# Altium PCB Gorilla Mist PCB file.PcbDoc
Units mm, origin at the board's own origin, x right, y up, seen from the top; angles counter-clockwise.
Board outline 46 x 86 mm, 2 copper layers (Top Layer, Bottom Layer); 56 components, 42 nets, 201 pads, 70 vias.
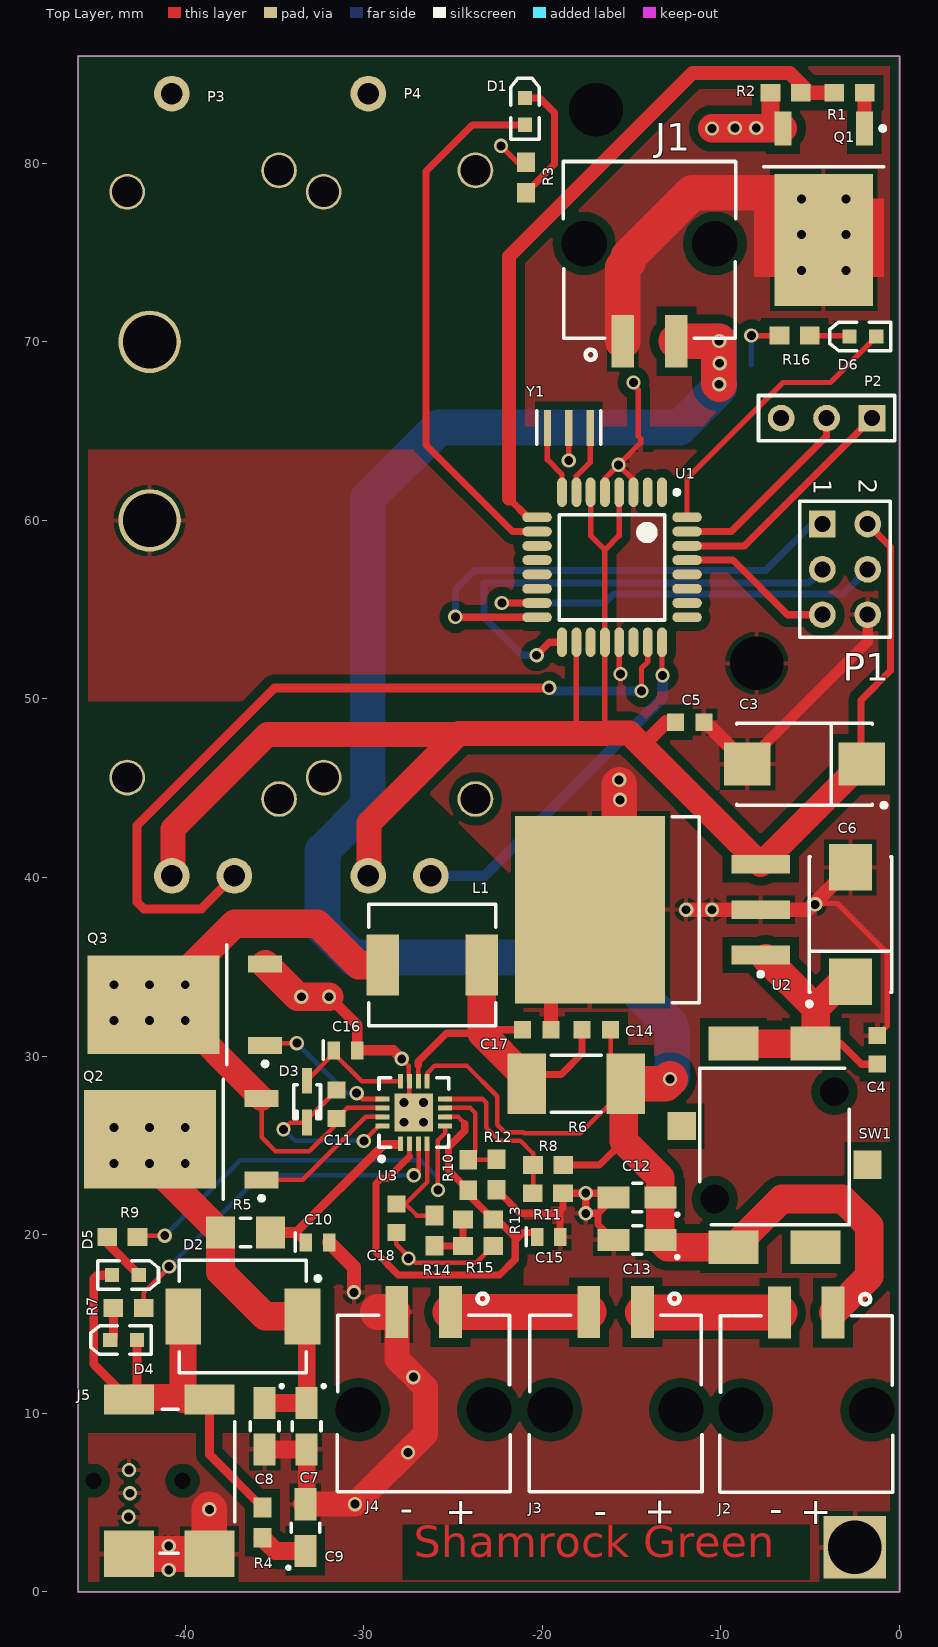
[diagram p0: Top Layer view]
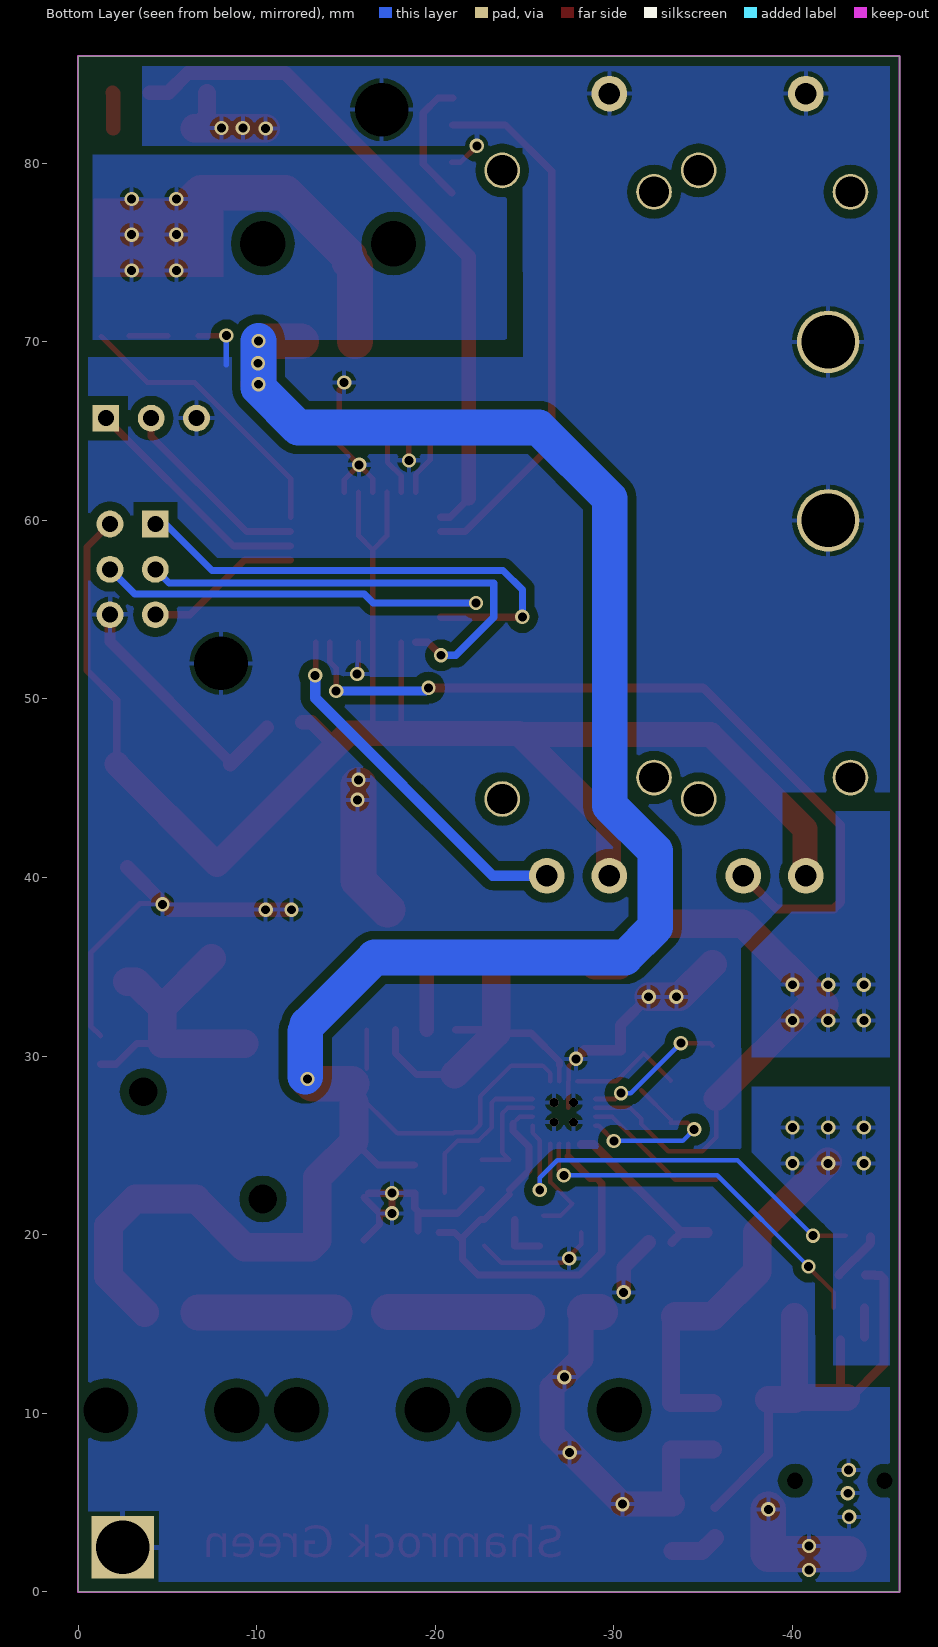
[diagram p1: Bottom Layer view, seen from below]

## Layer stack, top to bottom
Top Layer: signal copper 0.0356
Dielectric: dielectric 0.32, FR-4, Dk 4.8
Bottom Layer: signal copper 0.0356

## Board outline
0,86 -46,86 -46,0 0,0

## Design rules (kind name [scope] priority, off if disabled: settings)
Clearance Clearance_3 [InPolygon] p1: gap=0.5
Clearance [All] p2: gap=0.2
PlaneClearance [All] p1: clearance=0.8
PolygonConnect [All] p1: connectstyle=Relief reliefconductorwidth=0.254 reliefentries=4 polygonreliefangle="90 Angle" airgapwidth=0.254
RoutingVias [All] p1: holewidth=0.4 width=0.8 viastyle="Through Hole" minholewidth=0.3 minwidth=0.5 maxholewidth=0.8 maxwidth=1.2
SolderMaskExpansion [All] p1: expansion=0.102
Width [All] p1: maxlimit=3 minlimit=0.254 preferedwidth=0.4
27 further rules are at their usual default settings.

## Classes and differential pairs
component class "User Control Interface": D6 P1 P2 P3 P4 R16
component class "Power Management": C3 C4 C5 C6 C7 C8 C9 C10 C11 C12 C13 C14 C15 C16 C17 C18 D2 D3 D4 D5 J2 J3 J4 J5 L1 Q2 Q3 R4 R5 R6 R7 R8 R9 R10 R11 R12 R13 R14 R15 SW1 U2 U3
component class "Motor Interface": D1 J1 Q1 R1 R2 R3
component class "microcontroller interface": U1 Y1

## Components (designator, comment, footprint, x,y, rotation, side; value= is the part's Value field where it differs from the comment)
C3 "T491D107K016AT" D -5.325,46.35 r180 top
C4 "C0603C104K3RACTU" 0603 -1.25,30.35 r270 top
C5 "C0603C104K3RACTU" 0603 -11.75,48.7 r180 top
C6 "T491D107K016AT" D -2.75,37.375 r90 top
C7 "T491A106K010AT" A -33.2,9.275 r270 top
C8 "T491A106K010AT" A -35.55,9.275 r270 top
C9 "T491A225K010AT" A -33.275,3.6 r90 top
C10 "298D106X06R3M2T" M -32.6,19.575 r0 top
C11 "C0603C104K4RACTU" 0603 -31.525,27.3 r270 top
C12 "T491A106K010AT" A -14.7,22.075 r180 top
C13 "T491A106K010AT" A -14.7,19.7 r180 top
C14 "C0603C104K4RACTU" 0603 -16.975,31.475 r0 top
C15 "298D106X06R3M2T" M -19.65,19.875 r0 top
C16 "298D106X06R3M2T" M -31.025,30.325 r0 top
C17 "C0603C104K4RACTU" 0603 -20.325,31.475 r180 top
C18 "C0603C104K4RACTU" 0603 -28.175,20.925 r90 top
D1 "HSMB-C190" 1.6X0.8X0.8 -20.975,82.9 r90 top
D2 "SSC54" "DO-214AB (SMC)" -36.775,15.425 r0 top
D3 "BAT760" SOD323 -33.175,27.45 r270 top
D4 "HSMA-C190" 1.6X0.8X0.8 -43.45,14.1 r180 top
D5 "HSMG-C190" 1.6X0.8X0.8 -43.35,17.75 r0 top
D6 "HSMB-C190" 1.6X0.8X0.8 -2.05,70.3 r180 top
J1 "43650-0210" 43650-0210 -14.025,75.5 r180 top
J2 "43650-0210" 43650-0210 -5.2,10.175 r0 top
J3 "43650-0210" 43650-0210 -15.875,10.2 r0 top
J4 "43650-0210" 43650-0210 -26.625,10.2 r0 top
J5 "PJ-014DH-SMT" PJ-014DH-SMT -40.15,6.225 r180 top
L1 "IHLP2525CZERxRxM11" IHLP -26.175,35.1 r180 top
P1 "Header 3X2" HDR2X3 -4.325,59.8 r270 top
P2 "Header 3" HDR1X3 -1.55,65.725 r180 top
P3 "PS30-10PB10BR10K" PS30-10PB10BRxxx -39,62 r90 top
P4 "PS30-10PB10BR10K" PS30-10PB10BRxxx -28,62 r90 top
Q1 "IRLR3103" TO-252AA_N -4.25,77.45 r270 top
Q2 "IRFR3303" TO-252AA_N -40.225,25.35 r180 top
Q3 "IRFR3303" TO-252AA_N -40.025,32.875 r180 top
R1 "ERJ3GEYJ101V" 3-0603 -2.8,83.95 r0 top
R2 "ERJ3GEYJ103V" 3-0603 -6.375,83.95 r180 top
R3 "ERJ3GEYJ471V" 3-0603 -20.925,79.2 r270 top
R4 "ERJ3EKF2001V" 3-0603 -35.675,3.875 r90 top
R5 "ERJ-8ENF10R0V" 8-1206 -36.625,20.125 r0 top
R6 "ERJM1WSF10MU" M1WS-2512 -18.1,28.45 r0 top
R7 "ERJ3GEYJ103V" 3-0603 -43.175,15.9 r180 top
R8 "ERJ3GEYJ514V" 3-0603 -19.675,23.9 r0 top
R9 "ERJ3GEYJ103V" 3-0603 -43.525,19.875 r180 top
R10 "ERJ-3GEYJ104V" 3-0603 -24.15,23.35 r270 top
R11 "ERJ-3GEYJ104V" 3-0603 -19.7,22.325 r180 top
R12 "ERJ3EKF2212V" 3-0603 -22.575,23.375 r90 top
R13 "ERJ3EKF9311V" 3-0603 -23.6,20.85 r0 top
R14 "ERJ3GEYJ101V" 3-0603 -26.05,20.225 r90 top
R15 "ERJ3GEYJ434V" 3-0603 -23.6,19.375 r180 top
R16 "ERJ3GEYJ471V" 3-0603 -5.875,70.35 r0 top
SW1 "PVB4-EE" PVB4-EE -7,25 r270 top
U1 "ATmega328P-AU" 32A_N -16.1,57.375 r270 top
U2 "LP2954AIS/NOPB" TS3B_N -13.825,38.2 r180 top
U3 "BQ24600" QFN16 -27.2,26.85 r90 top
Y1 "CSTCE16M0V53" CSTCE_V_C -18.525,65.175 r0 top

## Footprints (in the part's own frame and the unit in brackets; to place one, negate y for a bottom-side part, rotate by r counter-clockwise, add the part's x,y. Pads: shape width x height; smd on the part's side, far side on the other; paste and mask are expansions set on the pad)
1.6X0.8X0.8 [mm] "SM LED; 2 Flat Leads"
  rect 0.8x0.8 smd: 1(-0.75,0) 2(0.75,0)
  silkscreen extent -1.55,-0.8 1.85,0.8
3-0603 [mm] "Chip Resistor; Body 1.6 x 0.9 mm (LxW typ)"
  rect 1.1x1 smd: 1(-0.85,0) 2(0.85,0)
8-1206 [mm] "Chip Resistor; Body 3.1 x 1.6 mm (LxW typ)"
  rect 1.6x1.8 smd: 1(-1.4,0) 2(1.4,0)
  silkscreen extent -0.3,-0.8 0.3,0.8
32A_N [mm] "Thin QFP, 32-Leads, Body 7x7mm, Pitch 0.8mm, IPC Medium Density"
  oval 1.65x0.55 smd: 1(-4.2,2.8) 2(-4.2,2) 3(-4.2,1.2) 4(-4.2,0.4) 5(-4.2,-0.4) 6(-4.2,-1.2) 7(-4.2,-2) 8(-4.2,-2.8) 17(4.2,-2.8) 18(4.2,-2) 19(4.2,-1.2) 20(4.2,-0.4) 21(4.2,0.4) 22(4.2,1.2) 23(4.2,2) 24(4.2,2.8)
  oval 0.55x1.65 smd: 9(-2.8,-4.2) 10(-2,-4.2) 11(-1.2,-4.2) 12(-0.4,-4.2) 13(0.4,-4.2) 14(1.2,-4.2) 15(2,-4.2) 16(2.8,-4.2) 25(2.8,4.2) 26(2,4.2) 27(1.2,4.2) 28(0.4,4.2) 29(-0.4,4.2) 30(-1.2,4.2) 31(-2,4.2) 32(-2.8,4.2)
  silkscreen extent -4.32,-2.95 2.95,3.75, body extent -3.5,-3.5 3.5,3.5, height 1.2
0603 [mm] "Chip Capacitor, 2-Leads, Body 1.60x0.80mm, IPC Medium Density"
  rect 0.95x1 smd: 1(-0.8,0) 2(0.8,0)
  body extent -0.8,-0.4 0.8,0.4, height 0.8
43650-0210 [mm] "43650 series, Power connector, 2 position, SMT, 5A power"
  rect 1.27x2.92 smd: 1(1.477,5.47) 2(-1.523,5.47)
  rect 0x0 hole 2.54: 3(3.637,0) 4(-3.683,0)
  silkscreen extent -4.86,-4.6 4.81,6.51, body extent -4.84,-4.6 4.81,5.31, height 5.57
A [mm] "Capacitor, SM Tantalum; Body 3.2 x 1.6 mm (LxW typ)"
  rect 1.8x1.23 smd: 1(-1.31,0) 2(1.31,0)
  silkscreen extent -2.33,-0.8 0.25,1.03, body extent -1.6,-0.8 1.6,0.8, height 1.6
CSTCE_V_C [mm] "Ceremic Resonantor,  3-Leads, Body 3.20x1.35mm, IPC Medium Density"
  rect 0.4x2 smd: 1(-1.2,0) 2(0,0) 3(1.2,0)
  silkscreen extent -1.8,-0.9 1.8,0.95, body extent -1.68,-0.72 1.68,0.72, height 1
D [mm] "Capacitor, SM Tantalum; Body 7.3 x 4.3 mm (LxW typ)"
  rect 2.6x2.4 smd: 1(-3.2,0) 2(3.2,0)
  silkscreen extent -4.58,-2.3 3.8,2.42
"DO-214AB (SMC)" [mm] "Molded Diode, 2-Leads, Body 6.85x5.90mm, IPC Medium Density"
  rect 2x3.15 smd: 1(-3.345,0) 2(3.345,0)
  silkscreen extent -3.55,-3.15 4.33,3.15, body extent -3.55,-3.1 3.55,3.1, height 2.63
HDR1X3 [mm] "Connector; Header; 3 Position"
  rect 1.5x1.5 hole 0.9: 1(0,0)
  round 1.5 hole 0.9: 2(2.54,0) 3(5.08,0)
  silkscreen extent -1.27,-1.27 6.35,1.27
HDR2X3 [mm] "Connector; Header; 3x2 Position"
  rect 1.5x1.5 hole 0.9: 1(0,0)
  round 1.5 hole 0.9: 2(0,2.54) 3(2.54,0) 4(2.54,2.54) 5(5.08,0) 6(5.08,2.54)
  silkscreen extent -1.27,-1.27 6.35,3.81
IHLP [mm] "Molded Inductor, 2-Leads, Body 6.80x6.45mm, IPC Medium Density"
  rect 1.83x3.43 smd: 1(-2.77,0) 2(2.77,0)
  silkscreen extent -3.55,-3.4 3.55,3.4, body extent -3.55,-3.35 3.55,3.35, height 3
M [mm] "Chip Capacitor, 2-Leads, Body 1.60x0.85mm, IPC Medium Density"
  rect 0.7x1 smd: 1(-0.65,0) 2(0.65,0)
  silkscreen extent -1.25,-0.5 -1.25,0.53, body extent -0.8,-0.43 0.8,0.42, height 0.9
M1WS-2512 [mm] "Chip Resistor; Body 6.4 x 3.2 mm (LxW typ)"
  rect 2.15x3.4 smd: 1(-2.775,0) 2(2.775,0)
  silkscreen extent -1.4,-1.6 1.4,1.6
PJ-014DH-SMT [mm] "DC Power Jack, SMT, 1.35mm ID, 3.5mm OD."
  rect 2.8x1.7 smd: 1(-1.5,-4.55) 1(3,-4.55)
  rect 2.8x2.6 smd: 2(3,4.1) 3(-1.5,4.1)
  round 0 hole 0.9: 4(0,0) 5(5,0)
  silkscreen extent -2.92,-4 1.27,4.06, body extent -2.92,-3.94 6.48,4.06, height 5.2
PS30-10PB10BRxxx [mm]
  round 2 hole 1.2: 1(-21.9,1.75) 2(-21.9,-1.75) 3(21.9,1.75)
  round 2 hole 1.7: 4(-16.4,4.25) 5(16.4,4.25) 6(-17.6,-4.25) 7(17.6,-4.25)
PVB4-EE [mm] "SPDt switch, SMD"
  rect 1.575x1.575 smd: 0(1.08,5.2) 3(-1.08,-5.2)
  rect 1.9x2.8 smd: 1(5.7,2.3) 2(5.7,-2.3) C(-5.7,2.3) C(-5.7,-2.3)
  round 0 hole 1.6: 9(-3,3.35) 10(3,-3.35)
  silkscreen extent -4.32,-4.19 4.45,4.19, body extent -5.08,-4.83 4.95,4.57, height 6.4
QFN16 [mm] "QFN, 16-Leads, Body 3.50x3.50mm, Pitch 0.50mm, Thermal Pad 2.14x2.14mm, IPC Medium Density"
  rect 0.8x0.28 smd: 1(-1.75,0.75) 2(-1.75,0.25) 3(-1.75,-0.25) 4(-1.75,-0.75) 9(1.75,-0.75) 10(1.75,-0.25) 11(1.75,0.25) 12(1.75,0.75)
  rect 0.28x0.8 smd: 5(-0.75,-1.75) 6(-0.25,-1.75) 7(0.25,-1.75) 8(0.75,-1.75) 13(0.75,1.75) 14(0.25,1.75) 15(-0.25,1.75) 16(-0.75,1.75)
  rect 2.14x2.14 smd: 17(0,0)
  silkscreen extent -2.72,-1.95 1.95,1.95, body extent -1.8,-1.8 1.8,1.8, height 1
SOD323 [mm] "SOD-323/SC-76; 2 Leads; Body 1.7 x 1.3 mm, (LxW)"
  rect 1.45x0.55 smd: 1(1.175,0) 2(-1.175,0)
  silkscreen extent -0.95,-0.75 0.95,0.75
TO-252AA_N [mm] "D-PAK, 4-Leads, Body 6.1x6.5mm, Pitch 2.28mm, Lead Span 9.9mm, IPC Medium Density"
  rect 1.9x0.95 smd: 1(-4.5,2.28) 3(-4.5,-2.28)
  rect 7.4x5.5 smd: 4(1.75,0)
  silkscreen extent -4.62,-3.35 -2.35,3.43, body extent -2.25,-3.37 4.1,3.37, height 2.38
TS3B_N [mm] "D2-PAK, 4-Leads, Body 8.6x10.2mm, Pitch 2.54mm, Lead Span 14.2mm, IPC Medium Density"
  rect 3.3x1.05 smd: 1(-6.05,2.54) 2(-6.05,0) 3(-6.05,-2.54)
  rect 8.4x10.5 smd: 4(3.5,0)
  silkscreen extent -6.18,-5.2 -1.1,5.2, body extent -2.6,-5.2 6.29,5.2, height 4.64

## Part data
C3 C6: library part T491D, "Solid Tantalum Chip Capacitor, Standard T491 Series - Industrial Grade"
C4 C5 C11 C14 C17 C18: library part C0603, "Ceramic Chip Capacitor - Standard"
C7 C8 C9 C12 C13: library part T491A, "Solid Tantalum Chip Capacitor, Standard T491 Series - Industrial Grade"
C10 C15 C16: "Solid Tantalum Chip Capacitors  298D microtan, 10uF, 6.3V, 20%,  0603,"
D1 D6: "Blue Surface Mount Chip LED, Blue"
D2: "High Current Density Schottky Rectifier, 5A, 40V, DO-214AB (SMC)"
D3: "Schottky Barrier Diode"
D4 D5: library part HSMB-C190, "Blue Surface Mount Chip LED, Blue"
J1 J2 J3 J4: "Power Connector, Micro-Fit 3.0 Header, SMT, Single Row, Right Angle, 2 Circuits"
J5: "DC Power Jack, 1.3 ID 3.5 OD, 3.5A, 24VDC, Normally Closed Switch, SMT, Right Angle"
L1: library part IHLP2525CZ, "Low Profile, High Current IHLP Inductor, 1uH to 22uH, 2.5 to 9A saturation current"
P1: "Header, 3-Pin, Dual row"
P2: "Header, 3-Pin"
P3 P4: library part PSxx-10PB10BRxxx, "slide potentiometer"
Q1 Q2 Q3: "HEXFET Power MOSFET"
R1 R2 R3 R7 R8 R9 R10 R11 R14 R15 R16: library part ERJ3GE, "Thick Film Chip Resistor, 1 Ohm to 10M Ohm Range, 5% Tolerance, 0603 Size, 0.1 W"
R4 R12 R13: library part ERJ3EK, "Precision Thick Film Chip Resistor, 10 Ohm to 1M Ohm Range, 1% and 0.5% Tolerance, 0603 Size, 0.063 W"
R5: library part ERJ8EN, "Precision Thick Film Chip Resistor, 10 Ohm to 2.2M Ohm Range, 1% Tolerance, 1206 Size, 0.125 W"
R6: library part ERJM1WS, "Low Resistance Value Chip Resistor, 3m Ohm to 20m Ohm Range, 1% and 5% Tolerance, 2512 Size, 1 W"
SW1: library part PVB4-EE300NSLFS, "Low profile SPDT switch, SMD."
U1: "8-bit AVR Microcontroller, 32KB Flash, 1KB EEPROM, 2KB SRAM, 32-pin TQFP, Industrial Grade (-40°C to 85°C)"
U2: "5V Micropower Low-Dropout Voltage Regulator, 3-pin TO-263, Pb-Free"
U3: "Multi-cell Battery Charger IC, Lithium ion and Lithium Polymer, standalone."
Y1: "Ceremic Resonator, 16 MHz, Built-in capacitance 15pF, SMT, 5% tolerance"

## Free pads (board coordinates)
  rect 3.5x3.5 hole 3: 0(-2.5,2.5)
  rect 0x0 hole 3: 1(-8,52) 2(-17,83)
  round 3.5 hole 3: 3(-42,70) 4(-42,60)

## Via types
v1: diameter 0.8, hole 0.5, Top Layer to Bottom Layer, 66 vias
v2: diameter 0.5, hole 0.5, Top Layer to Bottom Layer, 4 vias

## Nets (pads, with @x,y where several pads share a name; then routed paths per layer and width w, separated by ;. In a path a pad name is that pad's centre, name@x,y a point inside that pad or via, vN(x,y) a via of type N, cw(c..) or ccw(c..) an arc to the next point about the centre after c; other vN are vias at no path point)
DEBUG_LED: D6.1 U1.32 | length 16.1
  Top Layer w0.3: U1.32 -11.9,62.35 -6.525,67.725 -3.875,67.725 D6.1
DEBUG_RXD: P2.1 U1.30 | length 13.3
  Top Layer w0.4: U1.30 -8.7,58.575 P2.1
DEBUG_TXD: P2.2 U1.31 | length 11
  Top Layer w0.4: U1.31 -9.425,59.375 -4.09,64.71 P2.2
GND: C3.2 C4.1 C5.1 C6.2 C7.2 C8.2 C9.2 C10.2 C12.2 C13.2 C15.2 C16.2 C17.1 C18.1 J4.2 J5.2 J5.3 P1.6 P2.3 P3.3 P4.3 pad.0 pad.1 pad.2 pad.3 pad.4 Q1.3 Q3.3 R2.2 R3.1 R11.1 R12.1 R15.1 R16.1 U1.3 U1.5 U1.21 U2.2 U2.4 U3.11 U3.17 Y1.2 | length 136.8
  Top Layer w0.254: C18.1 -28.175,19.475 -27.125,18.425 -23.7,18.425 R15.1 ; v1(-27.875,29.85) -27.477,29.452 -27.477,28.627 U3.11 U3.17@-27.45,27.1
  Top Layer w0.3: v1(-22.325,80.975) -21.4,80.05 R3.1 ; v1(-18.525,63.35) Y1.2 ; U1.5 -16.5,62.35 v1(-15.737,63.113) ; v1@-15.7,51.175 U1.21 ; U1.3 -14.9,62.275 v1(-15.737,63.113) ; -14.625,64.7 -14.625,67.325 ; -14.5,64.575 -14.5,64.35 v1(-15.737,63.113) ; v1(-8.3,70.35) R16.1 ; v1@-4.775,38.55 -3.475,38.55 -0.7,35.775 -0.7,31.7 C4.1
  Top Layer w0.4: R12.1 -21.25,21.2 -19.15,21.2 ; C15.2@-19.025,20.225 -19.025,21.2 ; C12.2@-16.26,22.325 v1(-17.575,22.325) ; C13.2 -16.885,20.575 -16.885,21.2 ; C12.2 -16.885,21.2 ; -19.15,21.2 -19.025,21.2 ; -19.15,21.2 -19.025,21.325 ; -19.025,21.2 -19.025,21.325 ; -19.025,21.325 -18.85,21.5 R11.1 v1(-17.575,22.325) ; v1(-17.575,22.325) v1(-17.575,21.2) -16.885,21.2
  Top Layer w0.6: v1(-31.95,33.325) -30.375,31.75 C16.2 -28.35,30.325 v1(-27.875,29.85) ; C3.2 -8.525,46.475 -1.785,53.215 P1.6
  Top Layer w0.8: C10.2 -30.55,18.175 v1(-30.55,16.775) ; C17.1 U2.4@-19.525,36 ; v1(-11.95,38.2) v1(-10.5,38.2) U2.2 -5.125,38.2 -4.775,38.55 C6.2 ; C5.1@-10.575,48.4 C3.2
  Top Layer w1: C8.2 C7.2 C9.2@-33.2,4.985 ; R2.2 -7.225,82.645 Q1.3
  Top Layer w1.4: C9.2 v1(-30.49,4.91) -26.55,8.85 -26.55,11.45 -28.148,13.048 J4.2
  Top Layer w1.6: Q3.3 -33.695,33.325 v1(-33.5,33.325) v1(-31.95,33.325) ; v1(-10.5,81.95) Q1.3
  Top Layer w2: J5.2 J5.3 v1(-38.65,4.625) ; -29.22,15.67 J4.2@-28.375,15.67 ; U2.4 -15.7,39.825 v1@-15.7,45.2
  Bottom Layer w0.3: -8.3,68.7 v1(-8.3,70.35)
  other v1: -40.925,1.225 -40.925,2.575 -43.175,4.2 -43.1,5.525 -43.15,6.825 -27.525,7.8 -27.225,12.025 -27.5,18.675 -4.725,38.5 -15.65,44.35 -15.7,45.475 -15.625,51.4 -14.9,67.725 -9.225,81.975 -8.025,81.975
  other v2: -27.75,26.3 -26.65,26.3 -27.75,27.4 -26.65,27.4
ISP_MISO: P1.1 U1.16 | length 28.2
  Top Layer w0.4: v1(-24.875,54.6) -24.85,54.575 U1.16
  Bottom Layer w0.4: v1(-24.875,54.6) -24.875,56.125 -23.8,57.2 -7.5,57.2 -4.9,59.8 P1.1
ISP_MOSI: P1.4 U1.15 | length 23.2
  Top Layer w0.4: v1(-22.275,55.375) U1.15
  Bottom Layer w0.4: v1(-22.275,55.375) -16.525,55.375 -16.025,55.875 -3.17,55.875 P1.4
ISP_SCK: P1.3 U1.17 | length 26.7
  Top Layer w0.4: v1(-20.325,52.45) -19.6,53.175 U1.17
  Bottom Layer w0.4: v1(-20.325,52.45) -21.15,52.45 -23.275,54.575 -23.275,56.5 -5.085,56.5 P1.3
MOTOR_CTRL_PIN: R1.1 R2.1 U1.9 | length 38.1
  Top Layer w0.4: -21.875,61.225 -20.825,60.175 U1.9
  Top Layer w0.8: -21.875,61.225 -21.875,74.775 -11.6,85.05 -6.15,85.05 -5.05,83.95 R1.1@-4,83.95
MOTOR_DEBUG_PIN: D1.1 U1.10 | length 30.2
  Top Layer w0.4: D1.1 -23.925,82.15 -26.525,79.55 -26.525,64.225 -21.675,59.375 U1.10
NetC4_2: C4.2 C6.1 SW1.C U2.1 | length 17
  Top Layer w0.4: SW1.C@-4.7,30.7 -3.275,30.7 -2.125,29.55 C4.2
  Top Layer w1.6: SW1.C@-9.3,30.7 -4.7,30.7 -4.7,32.7 ; U2.1@-7.488,35.488 -4.7,32.7 ; C6.1 -3.225,34.175 -4.7,32.7
NetC7_1: C7.1 C8.1 D2.2 Q2.4 R5.1 | length 20.4
  Top Layer w1: C8.1 C7.1 D2.2@-33.2,15.195
  Top Layer w1.6: Q2.4@-41.975,24.075 R5.1 -38.025,17.925 -35.525,15.425 D2.2
  other v1: -44,24 -42,24 -40,24 -44,26 -42,26 -40,26
NetC9_1: C9.1 R4.1 | length 2.7
  Top Layer w1: R4.1 -34.94,2.29 C9.1
NetC10_1: C10.1 R5.2 U3.1 | length 9.9
  Top Layer w0.5: C10.1 -33.8,20.125 -28.875,25.05 -28.175,25.05
  Top Layer w0.6: R5.2 -33.8,20.125
NetC11_1: C11.1 D3.1 U3.16 | length 10
  Top Layer w0.254: v1(-34.5,25.9) -34.125,26.275 D3.1 ; D3.1@-33.175,26.45 C11.1 ; v1(-30,25.25) -29.15,26.1 U3.16
  Bottom Layer w0.254: v1(-34.5,25.9) -33.85,25.25 v1(-30,25.25)
NetC11_2: C11.2 L1.2 Q2.3 Q3.4 U3.14 | length 33.6
  Top Layer w0.254: Q2.3 -35.725,25.45 -34.95,24.675 -33.05,24.675 -31.525,26.2 C11.2 -30.925,27.1 U3.14
  Top Layer w1.4: Q3.4@-40.97,32.875 Q2.3
  Top Layer w1.6: Q3.4 -37.225,37.425 -32.6,37.425 -30.275,35.1 L1.2
  other v1: -44,32 -42,32 -40,32 -44,34 -42,34 -40,34
NetC14_1: C14.1 C17.2 L1.1 R6.1 U3.10 | length 19.4
  Top Layer w0.254: U3.10 -26.95,29.475
  Top Layer w0.4: -26.95,29.475 -26.95,29.7 -25.37,31.28 -23.405,31.28 ; -23.21,31.475 C17.2 ; R6.1@-21.1,28.975 -18.95,28.975 -17.775,30.15 C14.1
  Top Layer w1.6: -23.405,31.28 R6.1@-21.1,28.975 ; -23.405,31.475 L1.1
NetC15_1: C15.1 R10.2 R13.2 U3.2 U3.6 | length 27.9
  Top Layer w0.254: -27.45,24.375 U3.2 ; U3.6 -24.725,26.6 -24.35,26.225
  Top Layer w0.4: -27.45,24.375 -28.675,23.15 -29.05,23.15 -29.325,22.875 -29.325,19 -28.075,17.75 -22.4,17.75 -21.525,18.625 -21.525,19.675 ; -24.35,26.225 -24.35,25.825 -25.25,24.925 -25.25,23.6 R10.2 ; R10.2@-24.15,22.25 R13.2 -22.533,20.85 -21.525,19.842 -21.525,19.675 ; C15.1@-20.225,20.125 -21.075,20.125 -21.525,19.675
NetC16_1: C16.1 D3.2 U3.12 | length 6.5
  Top Layer w0.254: D3.2 -33.175,28.65 -31.675,30.15 -30.125,28.6 U3.12
NetC18_2: C18.2 R14.2 U3.4 | length 5.8
  Top Layer w0.254: U3.4 -26.45,22.95 -27.675,21.725 -27.025,21.075 R14.2
NetD1_2: D1.2 R3.2 | length 7.1
  Top Layer w0.4: D1.2 -20.15,83.65 -19.325,82.825 -19.325,79.95 R3.2
NetD2_1: D2.1 D4.1 D5.1 J5.1 R4.2 | length 28.2
  Top Layer w0.5: -44.65,17.725 -44.925,17.725 -45.125,17.525 -45.125,12.75 J5.1@-43.2,10.825 ; -44.625,17.75 D5.1 ; J5.1@-43.045,10.88 -42.7,11.225 D4.1 ; J5.1@-38.65,10.775 -38.65,7.7 R4.2
  Top Layer w1.5: J5.1@-43.045,10.88 -40.12,10.88 D2.1 ; -40.12,10.775 J5.1@-38.65,10.775
NetD4_2: D4.2 R7.2 | length 1.6
  Top Layer w0.5: D4.2@-44.025,14.275 R7.2
NetD5_2: D5.2 R9.2 | length 2.9
  Top Layer w0.5: R9.2 -44.375,19.525 D5.2
NetD6_2: D6.2 R16.2 | length 2.2
  Top Layer w0.3: R16.2 D6.2@-2.85,70.35
NetJ1_1: J1.1 Q1.4 | length 18.4
  Top Layer w2: J1.1 -15.502,74.167 -15.192,74.477 -15.192,74.758 -11.6,78.35 -6.9,78.35 Q1.4
  other v1: -5.5,74 -3,74 -5.5,76 -3,76 -5.5,78 -3,78
NetJ2_2: J2.2 J3.1 | length 7.6
  Top Layer w2: J3.1@-14.373,15.645 J2.2
NetJ3_2: J3.2 J4.1 | length 7.7
  Top Layer w2: J4.1 J3.2
NetQ1_1: Q1.1 R1.2 | length 2
  Top Layer w0.8: Q1.1 -1.97,83.905 R1.2@-1.925,83.95
NetQ2_1: Q2.1 U3.15 | length 8.2
  Top Layer w0.254: Q2.1 -33.43,23.07 -29.9,26.6 U3.15
NetQ3_1: Q3.1 U3.13 | length 7.9
  Top Layer w0.254: Q3.1 -35.395,30.725 v1(-33.75,30.725) ; v1(-30.4,27.925) -30.075,27.6 U3.13
  Bottom Layer w0.254: v1(-33.75,30.725) -30.95,27.925 v1(-30.4,27.925)
NetR7_1: R7.1 U3.3 | length 20.6
  Top Layer w0.254: R7.1 -42.325,16.763 -40.9,18.188 v1(-40.9,18.225) ; v1(-27.2,23.325) -26.923,23.602 -26.923,25.073 U3.3
  Bottom Layer w0.254: v1(-40.9,18.225) -35.8,23.325 v1(-27.2,23.325)
NetR8_1: R8.1 R11.2 U3.8 | length 9.2
  Top Layer w0.254: U3.8 -23.35,27.6 -23.15,27.4 -23.15,26 -22.425,25.275 -21.25,25.275 -20.525,24.55 R8.1 R11.2@-20.525,22.35
NetR9_1: R9.1 U3.5 | length 23.7
  Top Layer w0.254: R9.1@-42.975,19.95 v1(-41.15,19.95) ; v1(-25.85,22.5) -25.85,25.3 -25.45,25.7 U3.5
  Bottom Layer w0.254: v1(-41.15,19.95) -36.925,24.175 -26.825,24.175 -25.85,23.2 v1(-25.85,22.5)
NetR10_1: R10.1 R12.2 U3.7 | length 6.1
  Top Layer w0.254: U3.7 -24.05,27.1 -23.75,26.8 -23.75,24.6 R10.1 R12.2@-22.6,24.2
NetR13_1: R13.1 R14.1 R15.2 | length 2.8
  Top Layer w0.4: R14.1@-25.825,19.375 R15.2 R13.1
NetU1_7: U1.7 Y1.3 | length 3.9
  Top Layer w0.3: U1.7 -18.1,62.475 -17.325,63.25 Y1.3
NetU1_8: U1.8 Y1.1 | length 3.9
  Top Layer w0.3: Y1.1 -19.725,63.4 -18.9,62.575 U1.8
OFF_TIME_POT: P4.2 U1.24 | length 20.1
  Top Layer w0.3: v1@-13.3,51.35 U1.24
  Bottom Layer w0.6: P4.2@-26.2,40.1 -23.225,40.1 -13.275,50.05 v1(-13.275,51.325)
ON_TIME_POT: P3.2 U1.23 | length 45.1
  Top Layer w0.3: v1(-14.45,50.45) -14.45,51.725 -14.1,52.075 U1.23
  Top Layer w0.5: P3.2 -39.1,38.25 -42.325,38.25 -42.7,38.625 -42.7,42.925 -35,50.625 v1(-19.625,50.625)
  Bottom Layer w0.5: v1(-19.625,50.625) -19.45,50.45 v1(-14.45,50.45)
RESET: P1.5 U1.29 | length 8.8
  Top Layer w0.4: U1.29 -9.325,57.775 -6.27,54.72 P1.5
VBAT_P11V1: C12.1 C13.1 C14.2 J1.2 J2.1 R6.2 R8.2 SW1.2 U3.9 | length 131.2
  Top Layer w0.254: U3.9 -26.45,29.05 -26.025,29.475 -24.25,29.475 -22.525,27.75 -22.525,26.15 -22.104,25.729 -21.062,25.729 -21.008,25.675 -17.875,25.675 R6.2@-15.45,28.1 ; R6.2@-16.175,29.3 C14.2
  Top Layer w0.4: R8.2 -16.8,23.9 -15.45,25.25 ; R6.2@-15.45,27.575 R6.2@-15.45,28.1
  Top Layer w1.6: R6.2@-15.45,27.425 -15.45,25.25 -13.39,23.19 C12.1 C13.1 -12.99,19.3 SW1.2 -6.6,22 -3.2,22 -1.7,20.5 -1.7,17.668 J2.1
  Top Layer w2: R6.2 -13.125,28.45 v1(-12.85,28.725) ; J1.2 -10.12,70.03 v1@-10.12,67.645 ; v1(-10.1,67.625) v1@-10.1,67.645
  Bottom Layer w2: -12.85,31.775 -16.6,35.525 -30.625,35.525 -32.312,37.212 -32.312,41.488 -29.775,44.025 -29.775,61.225 -25.8,65.2 -12.325,65.2 -10.1,67.425 v1(-10.1,70.05) ; v1@-12.725,28.85 -12.725,31.4
  other v1: -10.075,68.8
VCC_P5V0: C3.1 C5.2 P1.2 P3.1 P4.1 U1.4 U1.6 U1.18 U1.20 U2.3 | length 98.2
  Top Layer w0.3: -18.1,48.1 U1.18 ; U1.6 -17.3,59.15 -16.5,58.35 ; -16.5,48.1 U1.20 -16.5,58.35 ; U1.4 -15.7,59.15 -16.5,58.35
  Top Layer w0.4: C3.1@-2.165,46.35 -2.165,49.935 -0.5,51.6 -0.5,58.515 P1.2
  Top Layer w0.8: -14.405,47.37 -13.075,48.7 C5.2
  Top Layer w1.4: P3.1@-40.7,40.15 -40.7,42.725 -35.4,48.025 -24.725,48.025 ; P4.1@-29.7,40.1 -29.7,43.05 -24.725,48.025 ; -16.5,48.075 -24.675,48.075 -24.725,48.025 ; -16.5,48.1 -15.135,48.1 -14.405,47.37 U2.3 C3.1@-2.165,46.35
pads on no net: J1.3 J1.4 J2.3 J2.4 J3.3 J3.4 J4.3 J4.4 J5.4 J5.5 P3.4 P3.5 P3.6 P3.7 P4.4 P4.5 P4.6 P4.7 SW1.0 SW1.1 SW1.3 SW1.9 SW1.10 U1.1 U1.2 U1.11 U1.12 U1.13 U1.14 U1.19 U1.22 U1.25 U1.26 U1.27 U1.28

## Polygon pours and split planes (outlines as drawn)
GND on Top Layer "Top Layer-GND" (solid, remove dead copper, pour order 10): -20.725,0 -0.225,0 -0.2,-0.025 -0.181,63.95 -46.106,63.95 -46.1,49.875 -31.5,49.875 -21.05,39.425 -21.05,17.2 -31.55,17.2 -31.7,17.05 -31.625,16.975 -31.625,8.891 -45.959,8.891 -46.2,8.65 -46.2,-0.025 -21.075,-0.025 -20.975,0.075
NetJ1_1 on Top Layer "Top Layer-No Net" (solid, remove dead copper, pour order 8): 0,86 -0.075,86.075 -30.525,86.075 -30.525,65.275 -11.025,65.275 -7.125,69.175 0,69.175
NetJ1_1 on Bottom Layer "Top Layer-No Net" (solid, remove dead copper, pour order 9): -0.825,80.475 -24,80.475 -24,70.025 -23.9,70.125 -0.825,70.125
NetC7_1 on Bottom Layer "Top Layer-No Net" (solid, remove dead copper, pour order 11): -46.05,28.3 -46.075,28.275 -46.075,12.7 -42.275,12.7 -42.275,20.075 -37.725,24.625 -37.725,28.3
NetC11_2 on Bottom Layer "Top Layer-No Net" (solid, remove dead copper, pour order 12): -45.5,29.95 -37.725,29.95 -37.725,35.825 -39.975,38.075 -42.425,38.075 -42.425,43.725 -45.5,43.725
GND on Bottom Layer "Top Layer-No Net" (solid, remove dead copper, pour order 7): -46,86 -25.05,86.05 -3.6,86.05 -3.6,80.95 -24.9,80.875 -24.925,69.15 -1.775,69.15 -0.125,69.125 -0.025,-0.175 -0.075,-0.225 -46,0 -46,11.45 -41.275,11.475 -41.25,19.4 -37.15,23.7 -37.1,36.05 -39.425,38.425 -39.425,44.775 -46,44.775

## Keep-outs
Keep-Out Layer:
  the board outline again, w0.1

## Other copper
Top Layer:
  rectangle net NetJ1_1: -8.15,73.625 -0.875,78.025
  text "Shamrock Green" at -27.2,1.35 h3

## Silkscreen, mask and mechanical layers (free items; w line width, h text height)
Top Overlay:
  text "-" at -27.975,3.925 h1.52
  text "-" at -7.3,3.9 h1.52
  text "+" at -14.3,3.825 h1.52
  text "-" at -17.125,3.8 h1.52
  text "+" at -5.55,3.8 h1.52
  text "+" at -25.45,3.775 h1.52
Bottom Solder:
  region: -1.3,79.9 -1.1,79.9 -1.1,71.425 -21.55,71.425 -21.525,79.625 -21.525,79.85
  region: -38,28.125 -38,24.7 -42.5,20.2 -42.5,12.95 -42.525,12.925 -45.125,12.925 -45.15,12.95 -45.15,28.125
  region: -45.2,43.5 -42.75,43.5 -42.675,43.425 -42.675,38.025 -42.65,38 -40.325,38 -37.95,35.625 -37.95,30.1 -45.25,30.1

## Text inside footprints (layer, text, board x,y; h text height)
P1: Top Overlay "2" at -2.293,62.34 h1 r270; Top Overlay "1" at -4.8,62.3 h1 r270